# EAGLE board LB1836M_breakout (EAGLE 6.3)
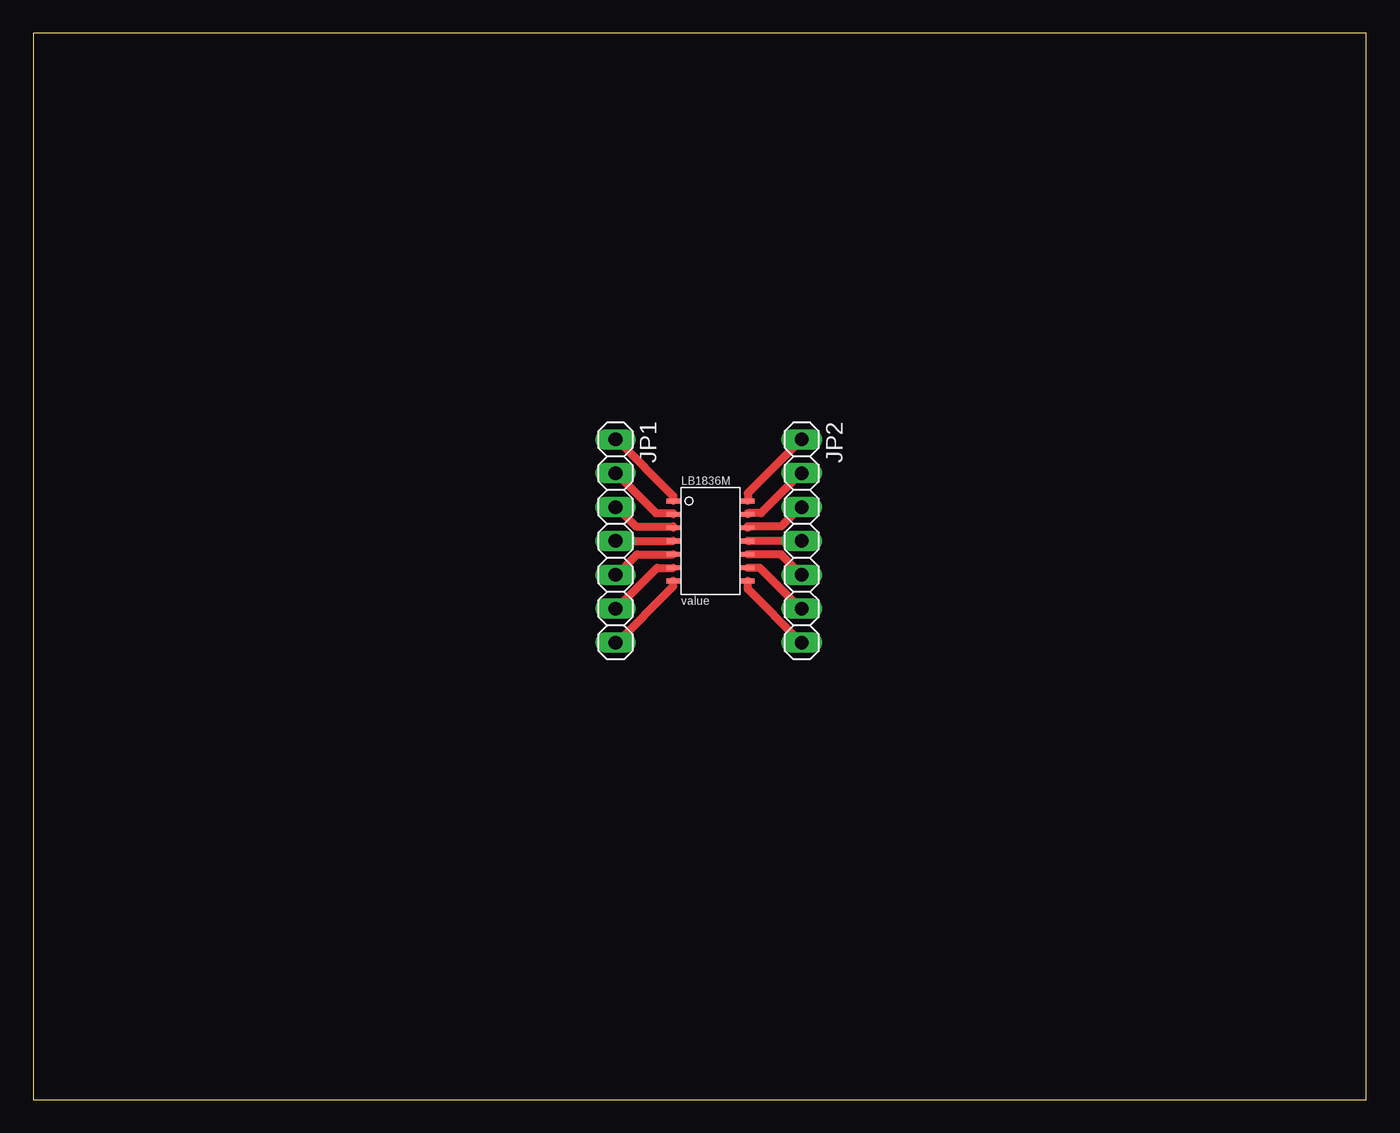
[diagram p0: board, top side]

Size 100 x 80 mm. Coordinates in mm from the lower left corner, seen from the top.
Outline: 0,0 100,0 100,80 0,80 0,0
Copper layers (1*16): Top 0.035mm / dielectric 1.5mm / Bottom 0.035mm
Design rules "default *": minimum track width 24mil, minimum drill 24mil, track to track 8mil, track to pad 8mil, pad to pad 8mil, via to via 8mil, smd to smd 8mil, copper to edge 40mil, drill to drill 8mil, minimum pad ring 10mil, minimum via ring 8mil, stop-mask expansion 4mil, vias tented up to drill 0mil, thermal gap 10mil

## Footprints (pad centres in the part's own frame; a part is rotated, then mirrored left to right if it is on the bottom)
1X07 = drill 1.016 long: 1 -7.62,0; 2 -5.08,0; 3 -2.54,0; 4 0,0; 5 2.54,0; 6 5.08,0; 7 7.62,0
MFP-14 = smd 1 x 0.35: GN2 2.8,3; GND1 -2.8,-3; IN1 -2.8,2; IN2 -2.8,-2; IN3 2.8,2; IN4 2.8,-2; OUT1 -2.8,1; OUT2 -2.8,-1; OUT3 2.8,1; OUT4 2.8,-1; VCC -2.8,3; VCONT 2.8,-3; VS1 -2.8,0; VS2 2.8,0

## Placement (x,y rotation side)
JP1  [1X07]  43.68,41.91 270 top
JP2  [1X07]  57.65,41.91 270 top
LB1836M  LB1836M  [MFP-14]  50.8,41.91 0 top

## Library data of the parts
JP1 JP2 = pinhead
LB1836M = jeroen

## Nets
N$1: JP2.1 LB1836M.GN2
N$2: JP2.2 LB1836M.IN3
N$3: JP2.3 LB1836M.OUT3
N$4: JP2.4 LB1836M.VS2
N$5: JP2.5 LB1836M.OUT4
N$6: JP2.6 LB1836M.IN4
N$7: JP2.7 LB1836M.VCONT
N$8: JP1.1 LB1836M.VCC
N$9: JP1.2 LB1836M.IN1
N$10: JP1.3 LB1836M.OUT1
N$11: JP1.4 LB1836M.VS1
N$12: JP1.5 LB1836M.OUT2
N$13: JP1.6 LB1836M.IN2
N$14: JP1.7 LB1836M.GND1

## Tracks (layer width: path | path; a pad name or v marks a point on that pad's centre or on a via)
N$1
  Top 0.61: LB1836M.GN2 53.6,45.5 57.6,49.5 JP2.1
N$2
  Top 0.61: LB1836M.IN3 53.6,44 54.6,44 57.6,47 JP2.2
N$3
  Top 0.61: LB1836M.OUT3 53.6,43 56.1,43 57.6,44.5 JP2.3
N$4
  Top 0.254: 53.34,41.91 LB1836M.VS2
  Top 0.61: LB1836M.VS2 53.7,41.9 57.6,41.9 JP2.4
N$5
  Top 0.61: LB1836M.OUT4 56.1,40.9 57.6,39.4 JP2.5
N$6
  Top 0.61: LB1836M.IN4 54.5,39.9 57.6,36.8 JP2.6
N$7
  Top 0.61: LB1836M.VCONT 53.6,38.3 57.6,34.3 JP2.7
N$8
  Top 0.61: LB1836M.VCC 48,45.3 43.7,49.6 JP1.1
N$9
  Top 0.61: LB1836M.IN1 48,44 46.7,44 43.7,47 JP1.2
N$10
  Top 0.61: LB1836M.OUT1 48,43 45.2,43 43.7,44.5 JP1.3
N$11
  Top 0.254: 48.26,41.91 LB1836M.VS1
  Top 0.61: LB1836M.VS1 47.9,41.9 43.7,41.9 JP1.4
N$12
  Top 0.61: LB1836M.OUT2 45.3,40.9 43.7,39.3 JP1.5
N$13
  Top 0.61: LB1836M.IN2 46.8,39.9 43.7,36.8 JP1.6
N$14
  Top 0.61: LB1836M.GND1 48,38.5 43.7,34.2 JP1.7